# Altium PCB Print PCB.PcbDoc
Units mil, origin at the board's own origin, x right, y up, seen from the top; angles counter-clockwise.
Board outline 6000 x 4000 mil, 2 copper layers (Top Layer, Bottom Layer); 170 components, 0 nets, 488 pads, 112 vias.
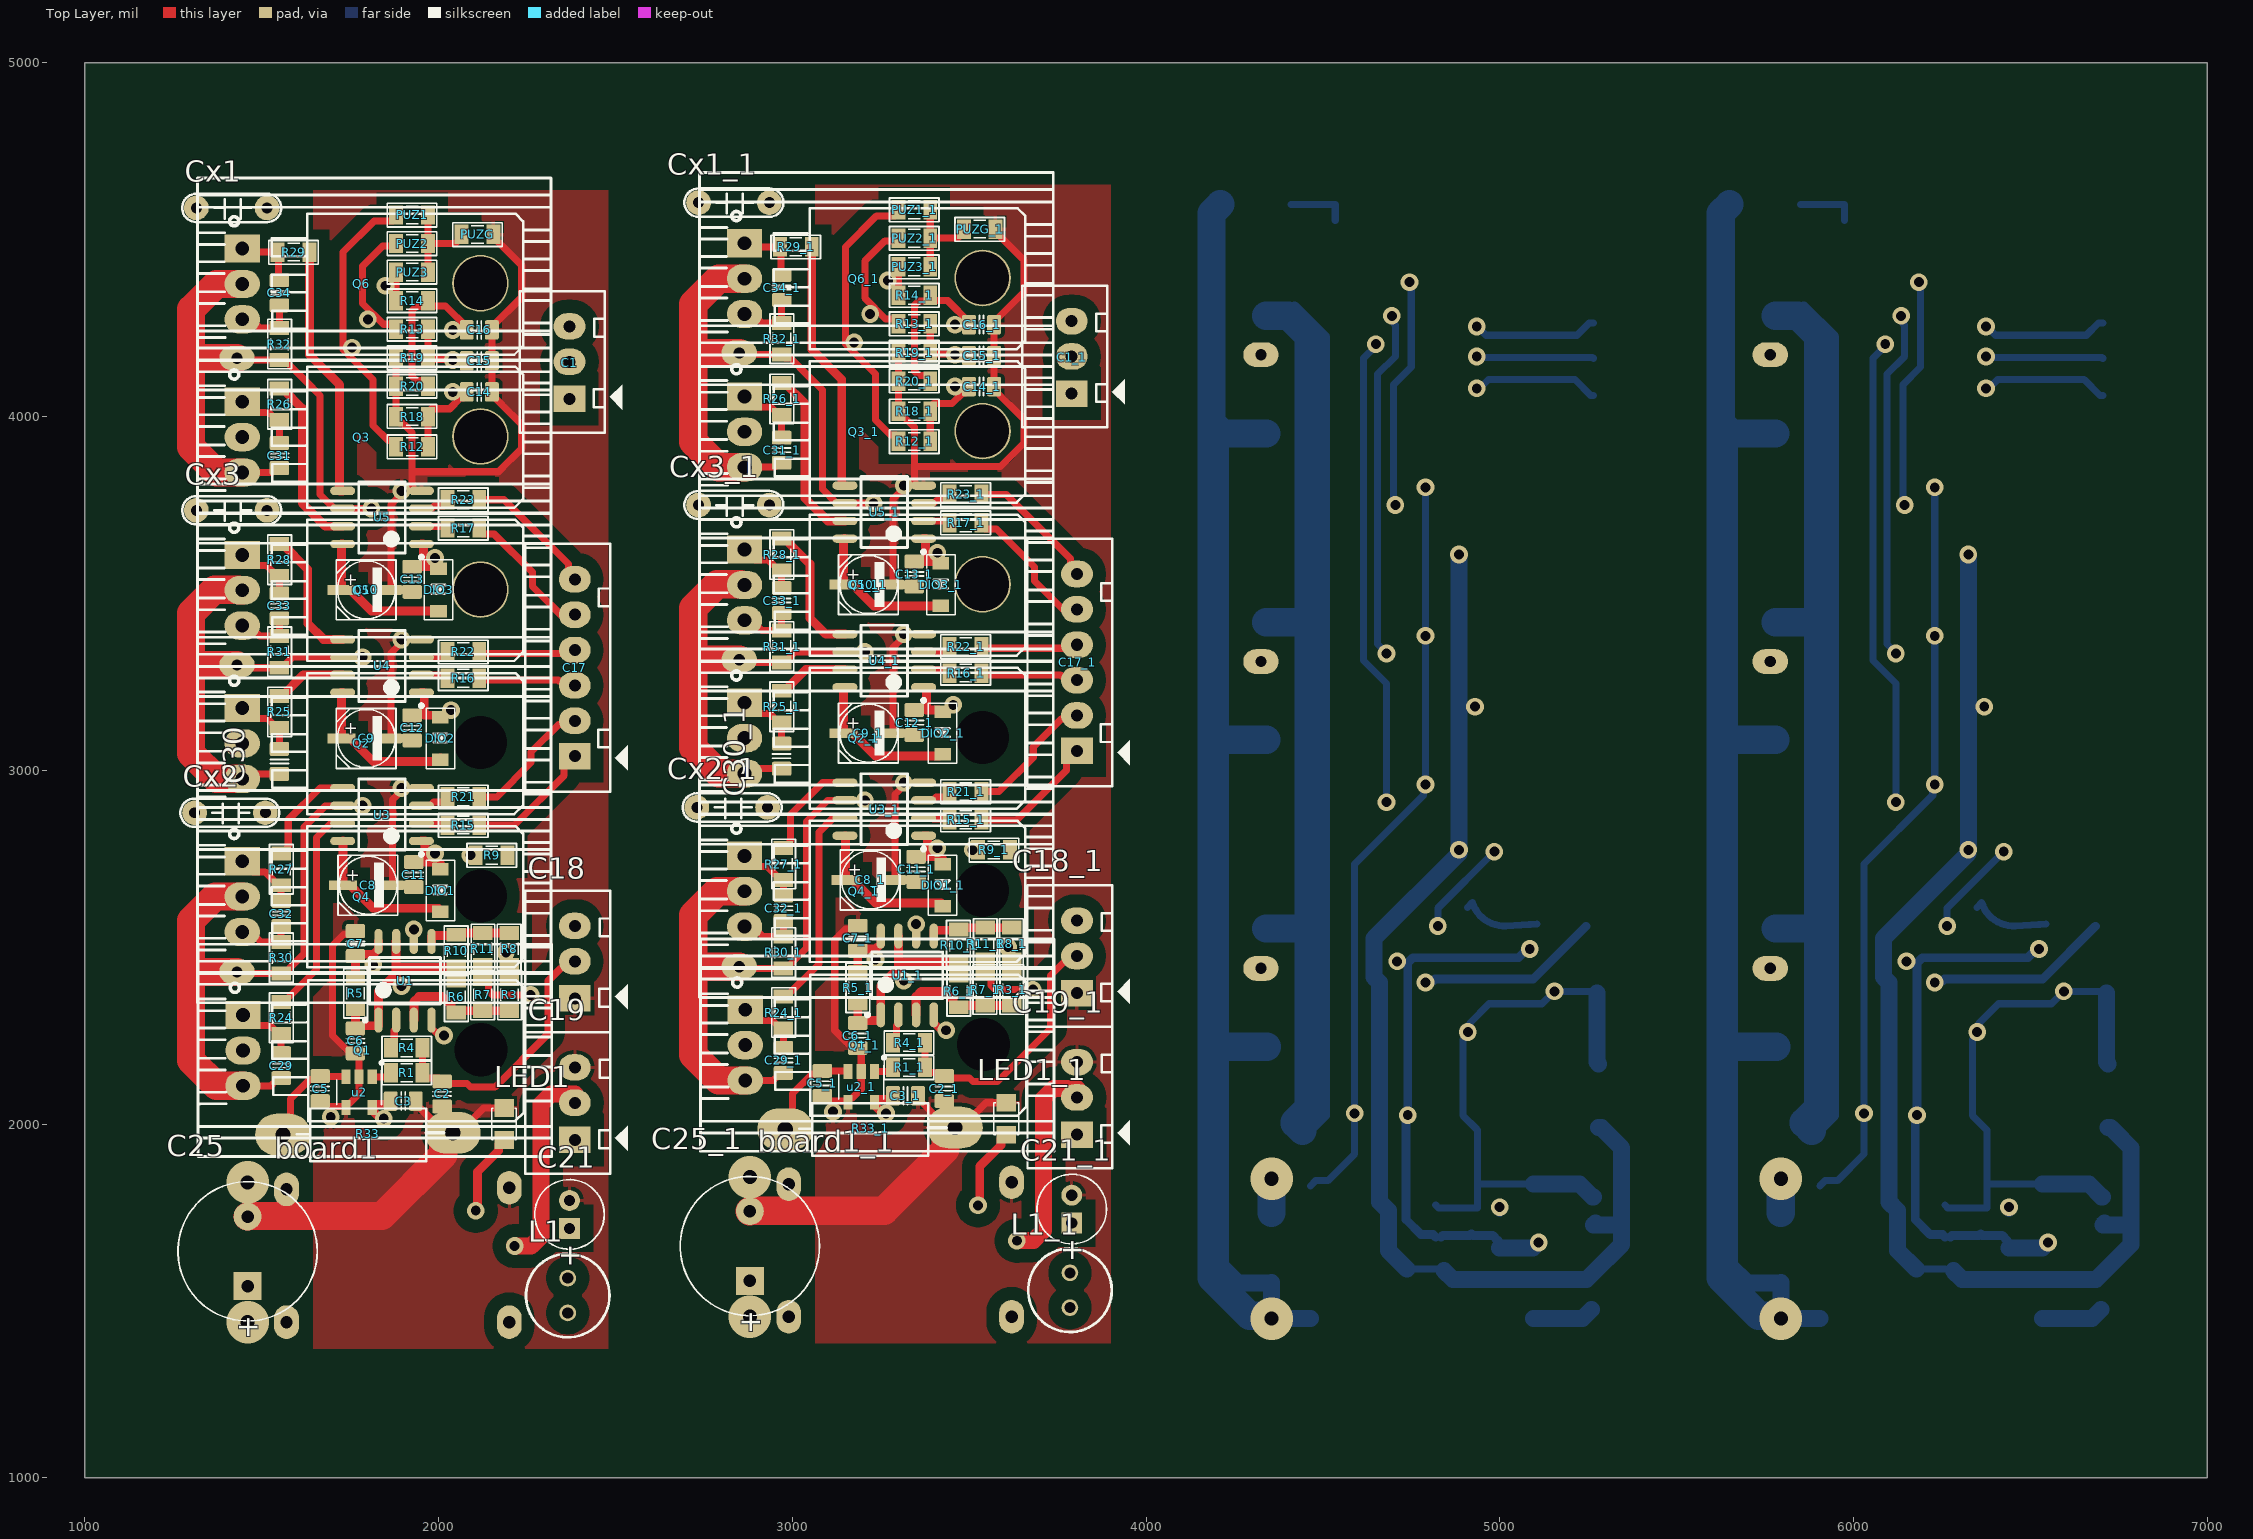
[diagram p0: Top Layer view]
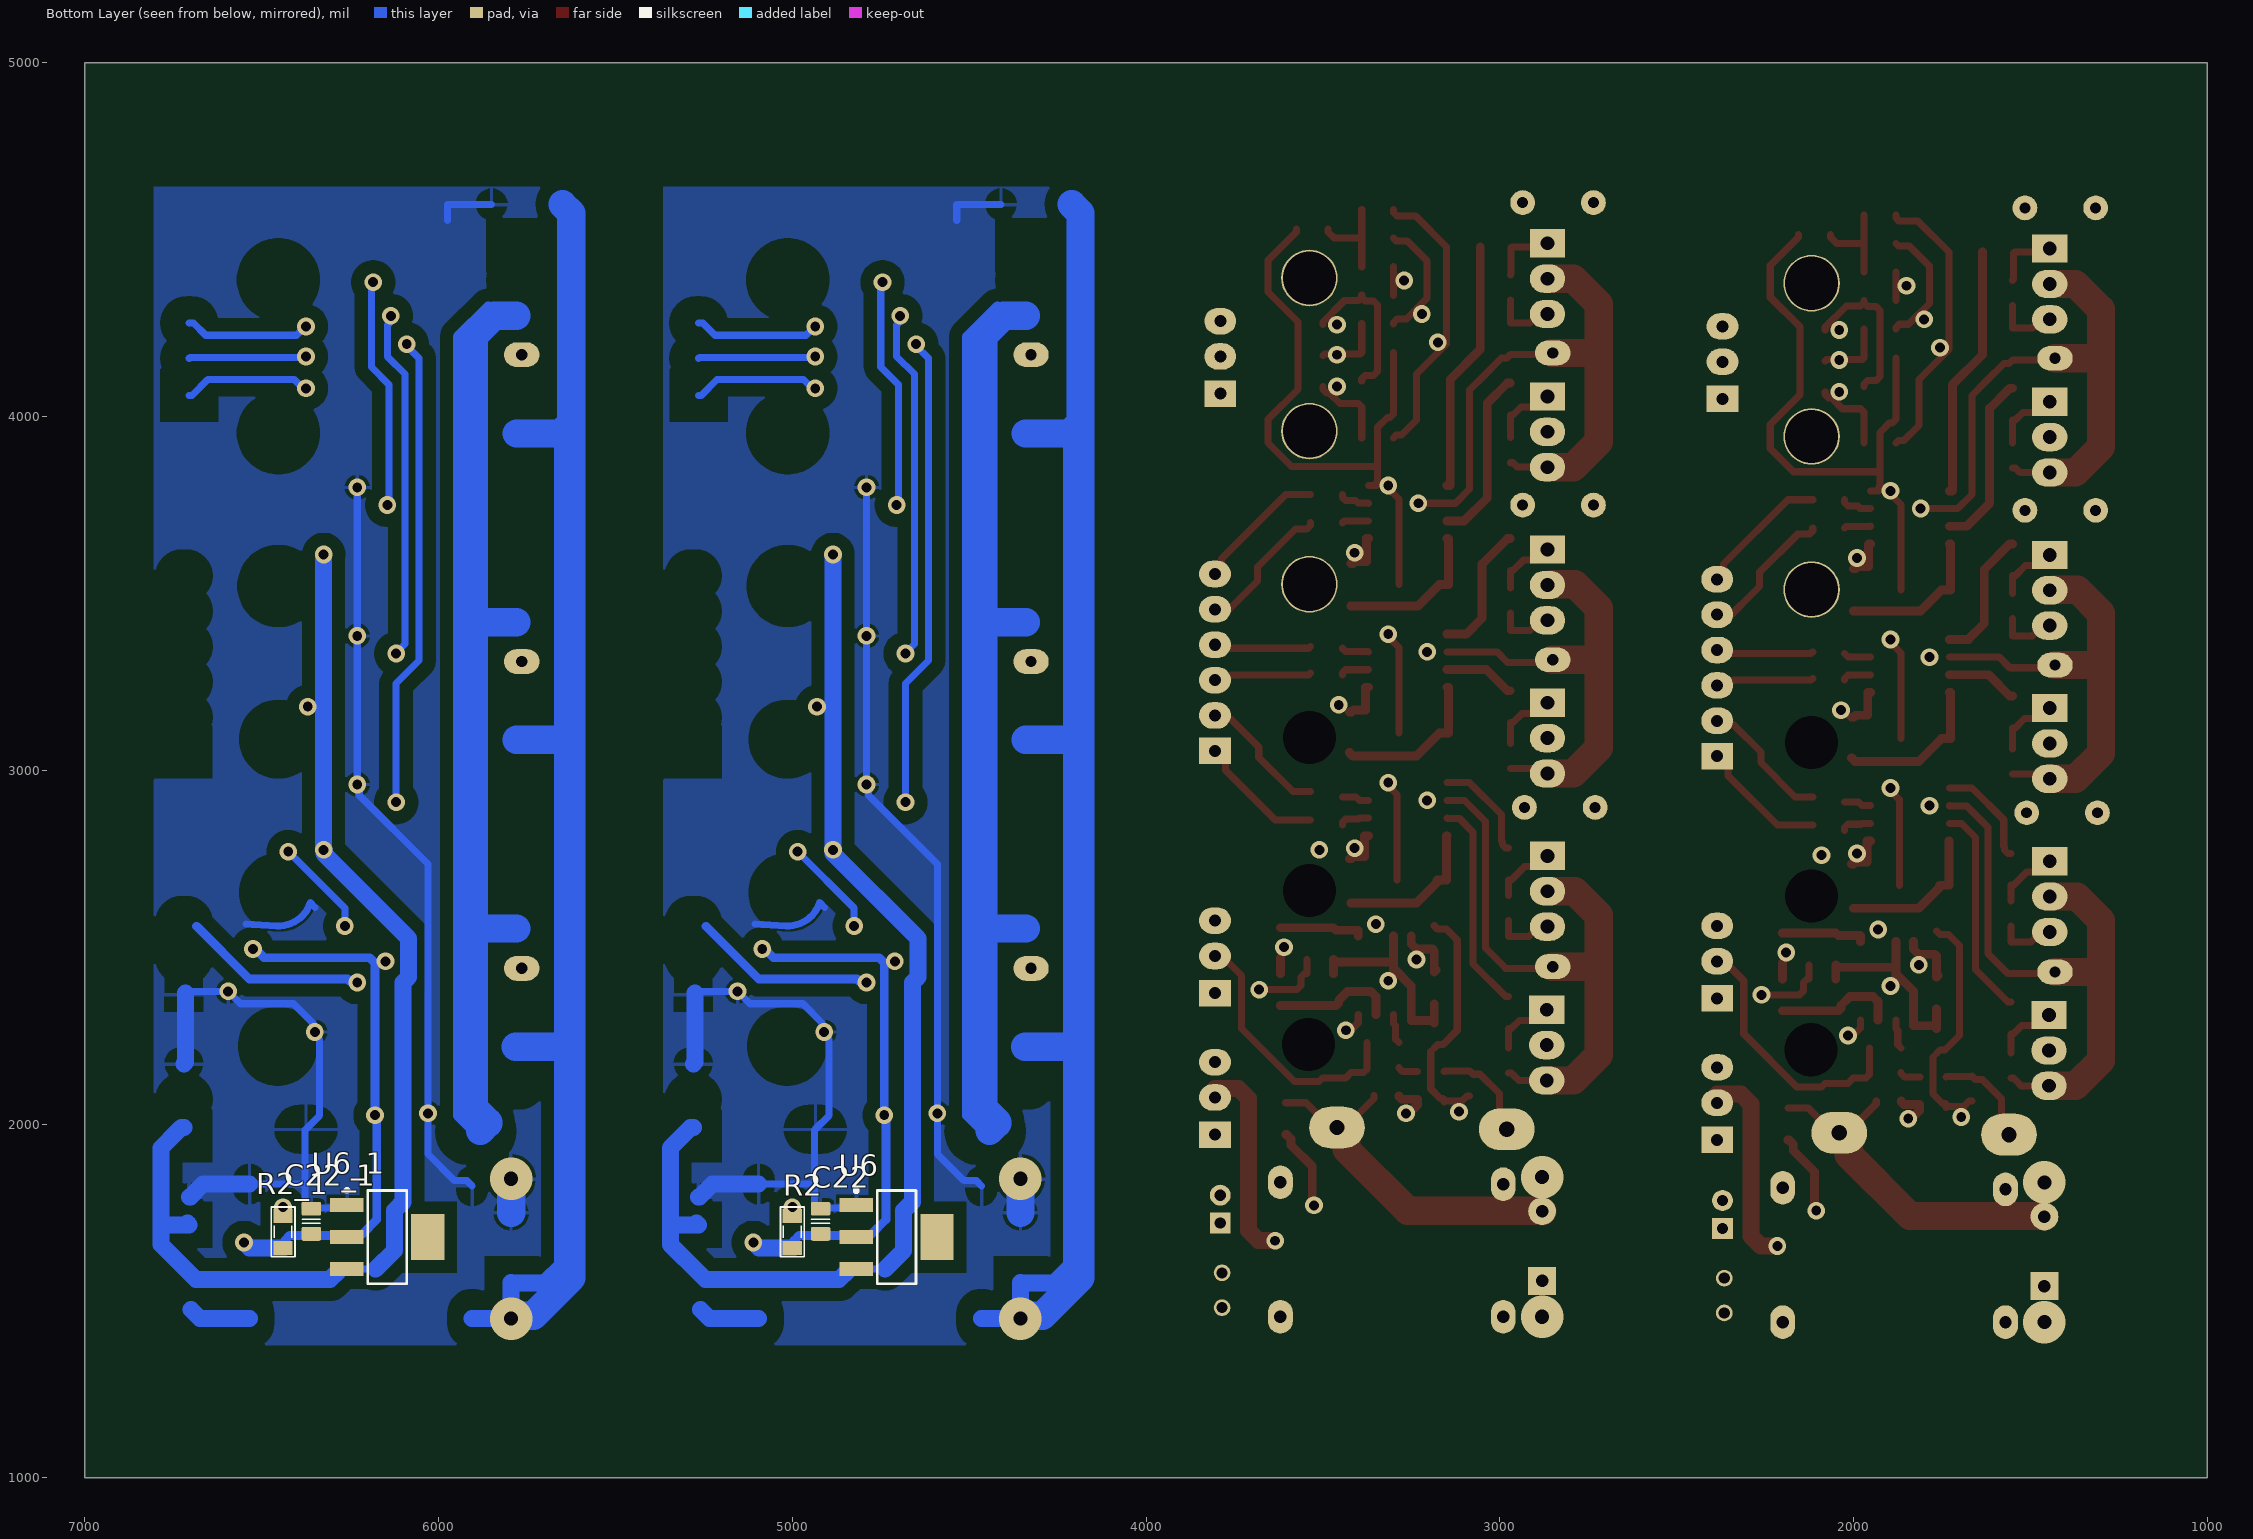
[diagram p1: Bottom Layer view, seen from below]

## Layer stack, top to bottom
Top Solder: solder mask 0.4, Solder Resist, Dk 3.5
Top Layer: signal copper 1.4
Dielectric 1: dielectric 12.6, FR-4, Dk 4.8
Bottom Layer: signal copper 1.4
Bottom Solder: solder mask 0.4, Solder Resist, Dk 3.5

## Board outline
1000,1000 7000,1000 7000,5000 1000,5000

## Design rules (kind name [scope] priority, off if disabled: settings)
Clearance [All] p1: gap=10 ignorepadtopadclearanceinfootprint=FALSE except(0: Arc-Hole Track-Hole SMDPad-Hole THPad-Hole Via-Hole Fill-Hole Poly-Hole Region-Hole Text-Hole)
PolygonConnect [All] p1: connectstyle=Relief reliefconductorwidth=10 reliefentries=4 polygonreliefangle="90 Angle" airgapwidth=10
RoutingVias [All] p1: holewidth=28 width=50 viastyle="Through Hole" minholewidth=28 minwidth=50 maxholewidth=28 maxwidth=50
SolderMaskExpansion [All] p1: expansion=4 istentingtop=FALSE
Width [All] p1: maxlimit=10 minlimit=10 preferedwidth=10
30 further rules are at their usual default settings.

## Components (designator, comment, footprint, x,y, rotation, side; value= is the part's Value field where it differs from the comment)
board1 "Converter DC-DC" mini360 1527,1395 r0 top
board1_1 "Converter DC-DC" mini360 2947,1410 r0 top (schematic designator board1)
C1 "Header3" Header3 2370,4055 r90 top
C1_1 "Header3" Header3 3790,4070 r90 top (schematic designator C1)
C2 "approved sub OK" CAPC2012X135N 2010,2085 r270 top value=0805
C2_1 "approved sub OK" CAPC2012X135N 3430,2100 r270 top value=0805 (schematic designator C2)
C3 "approved sub OK" CAPC2012X135N 1900,2065 r180 top value=0805
C3_1 "approved sub OK" CAPC2012X135N 3320,2080 r180 top value=0805 (schematic designator C3)
C5 "approved sub OK" CAPC2012X135N 1665,2100 r90 top value=0805
C5_1 "approved sub OK" CAPC2012X135N 3085,2115 r90 top value=0805 (schematic designator C5)
C6 "approved sub OK" CAPC2012X135N 1765,2235 r90 top value=0805
C6_1 "approved sub OK" CAPC2012X135N 3185,2250 r90 top value=0805 (schematic designator C6)
C7 "approved sub OK" CAPC2012X135N 1765,2510 r270 top value=0805
C7_1 "approved sub OK" CAPC2012X135N 3185,2525 r270 top value=0805 (schematic designator C7)
C8 "CN-ALU-SMD" CAP-ALU-SMD-5.5x5.5 1800,2675 r0 top
C8_1 "CN-ALU-SMD" CAP-ALU-SMD-5.5x5.5 3220,2690 r0 top (schematic designator C8)
C9 "CN-ALU-SMD" CAP-ALU-SMD-5.5x5.5 1795,3090 r0 top
C9_1 "CN-ALU-SMD" CAP-ALU-SMD-5.5x5.5 3215,3105 r0 top (schematic designator C9)
C10 "CN-ALU-SMD" CAP-ALU-SMD-5.5x5.5 1795,3510 r0 top
C10_1 "CN-ALU-SMD" CAP-ALU-SMD-5.5x5.5 3215,3525 r0 top (schematic designator C10)
C11 "approved sub OK" CAPC2012X135N 1930,2705 r90 top value=0805
C11_1 "approved sub OK" CAPC2012X135N 3350,2720 r90 top value=0805 (schematic designator C11)
C12 "approved sub OK" CAPC2012X135N 1925,3120 r90 top value=0805
C12_1 "approved sub OK" CAPC2012X135N 3345,3135 r90 top value=0805 (schematic designator C12)
C13 "approved sub OK" CAPC2012X135N 1925,3540 r90 top value=0805
C13_1 "approved sub OK" CAPC2012X135N 3345,3555 r90 top value=0805 (schematic designator C13)
C14 "approved sub OK" CAPC2012X135N 2115,4070 r0 top value=0805
C14_1 "approved sub OK" CAPC2012X135N 3535,4085 r0 top value=0805 (schematic designator C14)
C15 "approved sub OK" CAPC2012X135N 2115,4157.5 r0 top value=0805
C15_1 "approved sub OK" CAPC2012X135N 3535,4172.5 r0 top value=0805 (schematic designator C15)
C16 "approved sub OK" CAPC2012X135N 2115,4245 r0 top value=0805
C16_1 "approved sub OK" CAPC2012X135N 3535,4260 r0 top value=0805 (schematic designator C16)
C17 "Header6" Header6 2385,3040 r90 top
C17_1 "Header6" Header6 3805,3055 r90 top (schematic designator C17)
C18 "Header3" Header3 2385,2360 r90 top
C18_1 "Header3" Header3 3805,2375 r90 top (schematic designator C18)
C19 "Header3" Header3 2385,1960 r90 top
C19_1 "Header3" Header3 3805,1975 r90 top (schematic designator C19)
C21 "d5" CA-ALU-5 2370,1744.37 r90 top value=104
C21_1 "d5" CA-ALU-5 3790,1759.37 r90 top value=104 (schematic designator C21)
C22 "approved sub OK" CAPC2012X135N 4920,1725 r270 bottom value=0805
C22_1 "approved sub OK" CAPC2012X135N 6360,1725 r270 bottom value=0805 (schematic designator C22)
C25 "CN-10" CA-ALU-10 1460,1640 r90 top value=104
C25_1 "CN-10" CA-ALU-10 2880,1655 r90 top value=104 (schematic designator C25)
C29 "approved sub OK" CAPC2012X135N 1555,2165 r270 top value=0805
C29_1 "approved sub OK" CAPC2012X135N 2975,2180 r270 top value=0805 (schematic designator C29)
C30 "approved sub OK" CAPC2012X135N 1550,3025 r270 top value=0805
C30_1 "approved sub OK" CAPC2012X135N 2970,3040 r270 top value=0805 (schematic designator C30)
C31 "approved sub OK" CAPC2012X135N 1550,3890 r270 top value=0805
C31_1 "approved sub OK" CAPC2012X135N 2970,3905 r270 top value=0805 (schematic designator C31)
C32 "approved sub OK" CAPC2012X135N 1555,2595 r270 top value=0805
C32_1 "approved sub OK" CAPC2012X135N 2975,2610 r270 top value=0805 (schematic designator C32)
C33 "approved sub OK" CAPC2012X135N 1550,3465 r270 top value=0805
C33_1 "approved sub OK" CAPC2012X135N 2970,3480 r270 top value=0805 (schematic designator C33)
C34 "approved sub OK" CAPC2012X135N 1550,4350 r270 top value=0805
C34_1 "approved sub OK" CAPC2012X135N 2970,4365 r270 top value=0805 (schematic designator C34)
Cx1 "U" CN2-LT 1415,4585 r180 top value=33pF
Cx1_1 "U" CN2-LT 2835,4600 r180 top value=33pF (schematic designator Cx1)
Cx2 "V" CN2-LT 1410,2875 r180 top value=33pF
Cx2_1 "V" CN2-LT 2830,2890 r180 top value=33pF (schematic designator Cx2)
Cx3 "W" CN2-LT 1415,3730 r180 top value=33pF
Cx3_1 "W" CN2-LT 2835,3745 r180 top value=33pF (schematic designator Cx3)
DIO1 "Diode SMD" DIO-SMD-123 2005,2660 r90 top value=1N5007
DIO1_1 "Diode SMD" DIO-SMD-123 3425,2675 r90 top value=1N5007 (schematic designator DIO1)
DIO2 "Diode SMD" DIO-SMD-123 2005,3090 r90 top value=1N5007
DIO2_1 "Diode SMD" DIO-SMD-123 3425,3105 r90 top value=1N5007 (schematic designator DIO2)
DIO3 "Diode SMD" DIO-SMD-123 2000,3510 r90 top value=1N5007
DIO3_1 "Diode SMD" DIO-SMD-123 3420,3525 r90 top value=1N5007 (schematic designator DIO3)
L1 "L-DIP-1" L-DIP-M-5.3 2365,1515 r90 top value="150 mH"
L1_1 "L-DIP-1" L-DIP-M-5.3 3785,1530 r90 top value="150 mH" (schematic designator L1)
LED1 "bl" LED-0805-Blue 2185,1955 r90 top value="LED 3 - 5 ly 2 Colour"
LED1_1 "bl" LED-0805-Blue 3605,1970 r90 top value="LED 3 - 5 ly 2 Colour" (schematic designator LED1)
PUZ1 "0805" RES-SMD-0805 1925,4570 r0 top
PUZ1_1 "0805" RES-SMD-0805 3345,4585 r0 top (schematic designator PUZ1)
PUZ2 "0805" RES-SMD-0805 1925,4489.38 r0 top
PUZ2_1 "0805" RES-SMD-0805 3345,4504.38 r0 top (schematic designator PUZ2)
PUZ3 "0805" RES-SMD-0805 1925,4408.75 r0 top
PUZ3_1 "0805" RES-SMD-0805 3345,4423.75 r0 top (schematic designator PUZ3)
PUZG "0805" RES-SMD-0805 2110,4515 r0 top
PUZG_1 "0805" RES-SMD-0805 3530,4530 r0 top (schematic designator PUZG)
Q1 "dow" TO220NH#1 1447,2308 r270 top locked value=IRF840
Q1_1 "dow" TO220NH#1 2867,2323 r270 top locked value=IRF840 (schematic designator Q1)
Q2 "dow" TO220NH#2 1445,3176 r270 top locked value=IRF840
Q2_1 "dow" TO220NH#2 2865,3191 r270 top locked value=IRF840 (schematic designator Q2)
Q3 "dow" TO220NH#3 1445,4042 r270 top locked value=IRF840
Q3_1 "dow" TO220NH#3 2865,4057 r270 top locked value=IRF840 (schematic designator Q3)
Q4 "dow" TO220NH#2 1445,2743 r270 top locked value=IRF840
Q4_1 "dow" TO220NH#2 2865,2758 r270 top locked value=IRF840 (schematic designator Q4)
Q5 "dow" TO220NH#3 1445,3609 r270 top locked value=IRF840
Q5_1 "dow" TO220NH#3 2865,3624 r270 top locked value=IRF840 (schematic designator Q5)
Q6 "dow" TO220NH#3 1445,4475 r270 top locked value=IRF840
Q6_1 "dow" TO220NH#3 2865,4490 r270 top locked value=IRF840 (schematic designator Q6)
R1 "10" RES-SMD-0805 1910,2145 r0 top
R1_1 "10" RES-SMD-0805 3330,2160 r0 top (schematic designator R1)
R2 "0805" RES-SMD-0805 5000,1695 r90 bottom
R2_1 "0805" RES-SMD-0805 6440,1695 r90 bottom (schematic designator R2)
R3 "0805" RES-SMD-0805 2200,2365 r90 top
R3_1 "0805" RES-SMD-0805 3620,2380 r90 top (schematic designator R3)
R4 "0805" RES-SMD-0805 1910,2215 r0 top
R4_1 "0805" RES-SMD-0805 3330,2230 r0 top (schematic designator R4)
R5 "0805" RES-SMD-0805 1765,2370 r90 top
R5_1 "0805" RES-SMD-0805 3185,2385 r90 top (schematic designator R5)
R6 "0805" RES-SMD-0805 2050,2360 r90 top
R6_1 "0805" RES-SMD-0805 3470,2375 r90 top (schematic designator R6)
R7 "0805" RES-SMD-0805 2125,2365 r270 top
R7_1 "0805" RES-SMD-0805 3545,2380 r270 top (schematic designator R7)
R8 "0805" RES-SMD-0805 2200,2495 r270 top
R8_1 "0805" RES-SMD-0805 3620,2510 r270 top (schematic designator R8)
R9 "0805" RES-SMD-0805 2150,2760 r0 top
R9_1 "0805" RES-SMD-0805 3570,2775 r0 top (schematic designator R9)
R10 "0805" RES-SMD-0805 2050,2490 r270 top
R10_1 "0805" RES-SMD-0805 3470,2505 r270 top (schematic designator R10)
R11 "0805" RES-SMD-0805 2125,2495 r90 top
R11_1 "0805" RES-SMD-0805 3545,2510 r90 top (schematic designator R11)
R12 "0805" RES-SMD-0805 1925,3915 r0 top
R12_1 "0805" RES-SMD-0805 3345,3930 r0 top (schematic designator R12)
R13 "0805" RES-SMD-0805 1925,4247.5 r0 top
R13_1 "0805" RES-SMD-0805 3345,4262.5 r0 top (schematic designator R13)
R14 "0805" RES-SMD-0805 1925,4328.12 r0 top
R14_1 "0805" RES-SMD-0805 3345,4343.12 r0 top (schematic designator R14)
R15 "0805" RES-SMD-0805 2070,2845 r0 top
R15_1 "0805" RES-SMD-0805 3490,2860 r0 top (schematic designator R15)
R16 "0805" RES-SMD-0805 2070,3260 r0 top
R16_1 "0805" RES-SMD-0805 3490,3275 r0 top (schematic designator R16)
R17 "0805" RES-SMD-0805 2070,3685 r0 top
R17_1 "0805" RES-SMD-0805 3490,3700 r0 top (schematic designator R17)
R18 "0805" RES-SMD-0805 1925,4000 r180 top
R18_1 "0805" RES-SMD-0805 3345,4015 r180 top (schematic designator R18)
R19 "0805" RES-SMD-0805 1925,4165.88 r180 top
R19_1 "0805" RES-SMD-0805 3345,4180.88 r180 top (schematic designator R19)
R20 "0805" RES-SMD-0805 1925,4085.25 r180 top
R20_1 "0805" RES-SMD-0805 3345,4100.25 r180 top (schematic designator R20)
R21 "0805" RES-SMD-0805 2070,2925 r0 top
R21_1 "0805" RES-SMD-0805 3490,2940 r0 top (schematic designator R21)
R22 "0805" RES-SMD-0805 2070,3335 r0 top
R22_1 "0805" RES-SMD-0805 3490,3350 r0 top (schematic designator R22)
R23 "0805" RES-SMD-0805 2070,3765 r0 top
R23_1 "0805" RES-SMD-0805 3490,3780 r0 top (schematic designator R23)
R24 "0805" RES-SMD-0805 1555,2300 r90 top
R24_1 "0805" RES-SMD-0805 2975,2315 r90 top (schematic designator R24)
R25 "0805" RES-SMD-0805 1550,3165 r90 top
R25_1 "0805" RES-SMD-0805 2970,3180 r90 top (schematic designator R25)
R26 "0805" RES-SMD-0805 1550,4035 r90 top
R26_1 "0805" RES-SMD-0805 2970,4050 r90 top (schematic designator R26)
R27 "0805" RES-SMD-0805 1555,2720 r90 top
R27_1 "0805" RES-SMD-0805 2975,2735 r90 top (schematic designator R27)
R28 "0805" RES-SMD-0805 1550,3595 r90 top
R28_1 "0805" RES-SMD-0805 2970,3610 r90 top (schematic designator R28)
R29 "0805" RES-SMD-0805 1590,4465 r0 top
R29_1 "0805" RES-SMD-0805 3010,4480 r0 top (schematic designator R29)
R30 "0805" RES-SMD-0805 1555,2470 r90 top
R30_1 "0805" RES-SMD-0805 2975,2485 r90 top (schematic designator R30)
R31 "0805" RES-SMD-0805 1550,3335 r90 top
R31_1 "0805" RES-SMD-0805 2970,3350 r90 top (schematic designator R31)
R32 "0805" RES-SMD-0805 1550,4205 r90 top
R32_1 "0805" RES-SMD-0805 2970,4220 r90 top (schematic designator R32)
R33 "1/2" RES-1/2W 1820,1970 r180 top
R33_1 "1/2" RES-1/2W 3240,1985 r180 top (schematic designator R33)
U1 "LM393" SO8 1905,2405 r90 top
U1_1 "LM393" SO8 3325,2420 r90 top (schematic designator U1)
u2 "INA180" SOT-23-5 1775,2090 r270 top
u2_1 "INA180" SOT-23-5 3195,2105 r270 top (schematic designator u2)
U3 "IR2101" SO8 1840,2875 r180 top
U3_1 "IR2101" SO8 3260,2890 r180 top (schematic designator U3)
U4 "IR2101" SO8 1840,3295 r180 top
U4_1 "IR2101" SO8 3260,3310 r180 top (schematic designator U4)
U5 "IR2101" SO8 1840,3715 r180 top
U5_1 "IR2101" SO8 3260,3730 r180 top (schematic designator U5)
U6 "LM1117-3.3V" SOT223 4705,1680 r270 bottom
U6_1 "LM1117-3.3V" SOT223 6145,1680 r270 bottom (schematic designator U6)

## Footprints (in the part's own frame and the unit in brackets; to place one, negate y for a bottom-side part, rotate by r counter-clockwise, add the part's x,y. Pads: shape width x height; smd on the part's side, far side on the other; paste and mask are expansions set on the pad)
CA-ALU-5 [mm] "Polarized capacitors, Aluminum Electrolytic Capacitors, 2-Leads, Body 5x11x2x0.5"
  rect 1.5x1.5 hole 0.8: 1(-1,0)
  round 1.5 hole 0.8: 2(1,0)
  silkscreen extent -2.5,-2.5 2.5,2.5, body extent -2.41,-2.5 2.59,2.5, height 11
CA-ALU-10 [mm] "Polarized capacitors, Aluminum Electrolytic Capacitors, 2-Leads, Body 10x20x5x0.6"
  rect 2x2 hole 0.9: 1(-2.5,0)
  round 2 hole 0.9: 2(2.5,0)
  silkscreen extent -5,-5 5,5, body extent -5.08,-20.32 5.08,2.9, height 14.86
CAP-ALU-SMD-5.5x5.5 [mm]
  rect 2x0.7 smd: 1(-1.778,0)
  oval 2x0.7 smd: 2(1.778,0)
  silkscreen extent -2.15,-2.15 2.15,2.15, body extent -2.3,-2.15 2.3,2.15, height 5.4
CAPC2012X135N [mm] "Chip Capacitor, Body 2.0x1.2mm, EIA 0805, IPC Medium Density"
  round 0.254 on Mech15: 0(0,0)
  rrect25% 1x1.4 smd: 1(-0.9,0) 2(0.9,0)
  Top Layer pour cut-out: -0.675,0.7 -0.475,0.9 0.475,0.9 0.675,0.7 0.675,-0.7 0.475,-0.9 -0.475,-0.9 -0.675,-0.7
  silkscreen extent -0.15,-0.65 0.15,0.65, body extent -1.1,-0.72 1.1,0.73, height 1.34
CN2-LT [mil]
  round 70 hole 31: 1(-100,-5) 2(100,-5)
  silkscreen extent -140,-45 140,35, body extent -110,-48 110,39, height 276
DIO-SMD-123 [mm]
  rect 0.9x1.2 smd: 1(1.524,0) 2(-1.524,0)
  silkscreen extent -2.16,-1.02 2.16,1.02, body extent -1.76,-0.8 1.94,0.8, height 1.25
Header3 [mil] "CON 3"
  rect 75x90 hole 34: 1(-5,0)
  oval 75x90 hole 34: 2(100,0) 3(200,0)
  silkscreen extent -100,-150 300,140, body extent -95,-90 295,136, height 276
Header6 [mil] "CON6"
  rect 75x90 hole 34: 1(0,0)
  oval 75x90 hole 34: 2(100,0) 3(200,0) 4(300,0) 5(400,0) 6(500,0)
  silkscreen extent -100,-150 600,140
L-DIP-M-5.3 [mm] "THT Inductor, 2-Leads, Body 5.3  mm"
  round 1.2 hole 0.8: 1(-1.25,0) 2(1.25,0)
  silkscreen extent -3,-3 3,3, body extent -2.46,-2.44 2.44,2.45, height 7.49
LED-0805-Blue [mil]
  rect 50x55 smd: 1(0,0) 2(90,0)
  silkscreen extent 0,-35 90,35, body extent 5,-25 85,25, height 43
mini360 [mil] "power 3A"
  oval 70x95 hole 35: 1(43,420) 2(43,45) 3(673,425) 4(673,45)
  body extent 0,0 712,472, height 178
RES-1/2W [mm]
  oval 4x3 hole 1.1: 1(-5.588,-0.127) 2(6.604,0)
  silkscreen extent -4.95,-1.87 5.61,1.91, body extent -5.84,-1.52 6.86,1.43, height 4.08
RES-SMD-0805 [mil]
  rect 39.37x55 smd: 1(-45,0) 2(45,0)
  silkscreen extent -70,-34 70,33, body extent -39,-25 39,25, height 31
SO8 [mm] "SOIC, 8-Leads, Body 4.9x3.9mm, Pitch 1.27mm, IPC High Density"
  oval 1.8x0.6 smd: 1(-2.825,1.905) 2(-2.825,0.635) 3(-2.825,-0.635) 4(-2.825,-1.905) 5(2.825,-1.905) 6(2.825,-0.635) 7(2.825,0.635) 8(2.825,1.905)
  silkscreen extent -2.95,-2.55 1.68,2.98, body extent -2.99,-2.45 3,2.45, height 1.6
SOT223 [mm]
  rect 1x2.4 smd: 1(-2.3,-2.9) 2(0,-2.9) 3(2.3,-2.9)
  rect 3.3x2.4 smd: 4(0,2.9)
  silkscreen extent -3.47,-3.03 3.35,1.4, body extent -3.25,-3.56 3.25,3.4, height 1.68
SOT-23-5 [mm]
  rect 1.06x0.65 smd: 1(-1.1,0.95) 2(-1.1,0) 3(-1.1,-0.95) 4(1.1,-0.95) 5(1.1,0.95)
  silkscreen extent -2.19,-1.61 0.9,1.72, body extent -1.25,-1.5 1.25,1.5, height 1.1
TO220NH#1 [mil] "TO-220 - 1-2-3"
  rect 80x100 hole 39: 1(0,0)
  oval 80x100 hole 39: 2(100,0) 3(200,0)
  round 0 hole 150: vcc(98,673)
  silkscreen extent -200,-127 400,873, body extent -100,-4 300,764
TO220NH#2 [mil] "TO-220 - 1-2-3"
  rect 80x100 hole 39: 1(0,0)
  oval 80x100 hole 39: 2(100,0) 3(200,0)
  round 0 hole 150: H(98,673)
  silkscreen extent -200,-127 400,873, body extent -100,-4 300,764
TO220NH#3 [mil] "TO-220 - 1-2-3"
  rect 80x100 hole 39: 1(0,0)
  oval 80x100 hole 39: 2(100,0) 3(200,0)
  round 160 hole 150: H(98,673)
  silkscreen extent -200,-127 400,873, body extent -100,-4 300,764

## Part data
board1 board1_1: "Step DC-DC"
C1 C1_1 C18 C18_1 C19 C19_1: "Header IDC, 3 x 1 Pin Vertical 2.54mm Pitch (Non-Boxed, Male)", Manufacturer="W¨¹rth Elektronik eiSos GmbH", partNo=613002143121, ComponentLink1 Description=Manufacturer, ComponentLink1URL=http://www.we-online.com, ComponentLink2 Description=Datasheet, ComponentLink2URL=http://katalog.we-online.de/em/datasheet/6130xx143121.pdf, Created by="Karrer Zheng", Created Date="29 March 2013", NoPins=02
C2 C2_1 C3 C3_1 C5 C5_1 C6 C6_1 C7 C7_1 C11 C11_1 C12 C12_1 C13 C13_1 C14 C14_1 C15 C15_1 C16 C16_1 C22 C22_1 C29 C29_1 C30 C30_1 C31 C31_1 C32 C32_1 C33 C33_1 C34 C34_1: library part "CAP C_0805", "Capacitor SMD Cer 1.8nF 10% 50V X7R 0805", Manufacturer 1="AVX Corporation", Manufacturer Part Number 1=08055C182KAT2A, Operating Temperature="-55°C ~ 125°C", Package / Case="0805 (2012 metric)", Ratings="50V; X7R", Supplier Part Number 1=478-1374-1-ND, Tolerance=±10%, SCDType=source*, Supplier 1=Digi-Key
C8 C8_1 C9 C9_1 C10 C10_1: "Polarized Capacitor (Axial)", LatestRevisionDate=17-Jul-2002, LatestRevisionNote="Re-released for DXP Platform.", PackageReference=POLAR0.8, Published=8-Jun-2000, Publisher="Altium Limited"
C17 C17_1: "Header IDC, 6 x 1 Pin Vertical 2.54mm Pitch (Non-Boxed, Male)", Manufacturer="W¨¹rth Elektronik eiSos GmbH", partNo=613002143121, ComponentLink1 Description=Manufacturer, ComponentLink1URL=http://www.we-online.com, ComponentLink2 Description=Datasheet, ComponentLink2URL=http://katalog.we-online.de/em/datasheet/6130xx143121.pdf, Created by="Karrer Zheng", Created Date="29 March 2013", NoPins=02
C21 C21_1 C25 C25_1: library part CN-ALU-DIP, "Capacitor (Semiconductor SIM Model)", LatestRevisionDate=17-Jul-2002, LatestRevisionNote="Re-released for DXP Platform.", PackageReference=C1206, Publisher="Altium Limited"
Cx1 Cx1_1 Cx2 Cx2_1 Cx3 Cx3_1: library part CN
DIO1 DIO1_1 DIO2 DIO2_1 DIO3 DIO3_1: "Default Diode", Code - JEDEC=DO-214-AB, Published=8-Jun-2000, Publisher="Altium Limited", Revision="July-2002: Re-released for DXP Platform."
L1 L1_1: "Inductor"
LED1 LED1_1: library part "LED SMD"
PUZ1 PUZ1_1 PUZ2 PUZ2_1 PUZ3 PUZ3_1 PUZG PUZG_1 R1 R1_1 R2 R2_1 R3 R3_1 R4 R4_1 R5 R5_1 R6 R6_1 R7 R7_1 R8 R8_1 R9 R9_1 R10 R10_1 R11 R11_1 R12 R12_1 R13 R13_1 R14 R14_1 R15 R15_1 R16 R16_1 R17 R17_1 R18 R18_1 R19 R19_1 R20 R20_1 R21 R21_1 R22 R22_1 R23 R23_1 R24 R24_1 R25 R25_1 R26 R26_1 R27 R27_1 R28 R28_1 R29 R29_1 R30 R30_1 R31 R31_1 R32 R32_1: library part Res-SMD, "Resistor", Manufacturer="Generic Components", Class=Passive, Published=08/06/2000, Publisher="Altium Hobart Technology Centre"
Q1 Q1_1 Q2 Q2_1 Q3 Q3_1 Q4 Q4_1 Q5 Q5_1 Q6 Q6_1: library part IRF840, "MOSFET N - CHANNEL 500V - 0.75 - 8A - TO-220"
R33 R33_1: library part Res, "Res", Manufacturer="Generic Components", Class=Passive, Published=08/06/2000, Publisher="Altium Hobart Technology Centre", SubClass=R
U1 U1_1: "IC DUAL COMPARATOR"
u2 u2_1: library part SOT-23-5_SMD, "SMD_IC_SOT-23-5"
U3 U3_1 U4 U4_1 U5 U5_1: library part IR2101S, "Half-Bridge Driver"
U6 U6_1: library part LM1117, "800mA Low-Dropout Linear Regulator", Creator="Nguyen Ba Bien", Website=http://group3i.net

## Free pads (board coordinates)
  oval 100x70 hole 32: 4(1430,2430) 4(1430,3297.5) 4(1430,4165) 4(2850,2445) 4(2850,3312.5) 4(2850,4180) 4(4325,2440) 4(4325,3307.5) 4(4325,4175) 4(5765,2440) 4(5765,3307.5) 4(5765,4175)

## Via types
v1: diameter 50, hole 28, Top Layer to Bottom Layer, 104 vias
v2: diameter 120, hole 40, Top Layer to Bottom Layer, 8 vias

## Nets (pads, with @x,y where several pads share a name; then routed paths per layer and width w, separated by ;. In a path a pad name is that pad's centre, name@x,y a point inside that pad or via, vN(x,y) a via of type N, cw(c..) or ccw(c..) an arc to the next point about the centre after c; other vN are vias at no path point)
pads on no net: board1.1 board1.2 board1.3 board1.4 board1_1.1 board1_1.2 board1_1.3 board1_1.4 C1.1 C1.2 C1.3 C1_1.1 C1_1.2 C1_1.3 C2.0 C2.1 C2.2 C2_1.0 C2_1.1 C2_1.2 C3.0 C3.1 C3.2 C3_1.0 C3_1.1 C3_1.2 C5.0 C5.1 C5.2 C5_1.0 C5_1.1 C5_1.2 C6.0 C6.1 C6.2 C6_1.0 C6_1.1 C6_1.2 C7.0 C7.1 C7.2 C7_1.0 C7_1.1 C7_1.2 C8.1 C8.2 C8_1.1 C8_1.2 C9.1 C9.2 C9_1.1 C9_1.2 C10.1 C10.2 C10_1.1 C10_1.2 C11.0 C11.1 C11.2 C11_1.0 C11_1.1 C11_1.2 C12.0 C12.1 C12.2 C12_1.0 C12_1.1 C12_1.2 C13.0 C13.1 C13.2 C13_1.0 C13_1.1 C13_1.2 C14.0 C14.1 C14.2 C14_1.0 C14_1.1 C14_1.2 C15.0 C15.1 C15.2 C15_1.0 C15_1.1 C15_1.2 C16.0 C16.1 C16.2 C16_1.0 C16_1.1 C16_1.2 C17.1 C17.2 C17.3 C17.4 C17.5 C17.6 C17_1.1 C17_1.2 C17_1.3 C17_1.4 C17_1.5 C17_1.6 C18.1 C18.2 C18.3 C18_1.1 C18_1.2 C18_1.3 C19.1 C19.2 C19.3 C19_1.1 C19_1.2 C19_1.3 C21.1 C21.2 C21_1.1 C21_1.2 C22.0 C22.1 C22.2 C22_1.0 C22_1.1 C22_1.2 C25.1 C25.2 C25_1.1 C25_1.2 C29.0 C29.1 C29.2 C29_1.0 C29_1.1 C29_1.2 C30.0 C30.1 C30.2 C30_1.0 C30_1.1 C30_1.2 C31.0 C31.1 C31.2 C31_1.0 C31_1.1 C31_1.2 C32.0 C32.1 C32.2 C32_1.0 C32_1.1 C32_1.2 C33.0 C33.1 C33.2 C33_1.0 C33_1.1 C33_1.2 C34.0 C34.1 C34.2 C34_1.0 C34_1.1 C34_1.2 Cx1.1 Cx1.2 Cx1_1.1 Cx1_1.2 Cx2.1 Cx2.2 Cx2_1.1 Cx2_1.2 Cx3.1 Cx3.2 Cx3_1.1 Cx3_1.2 DIO1.1 DIO1.2 DIO1_1.1 DIO1_1.2 DIO2.1 DIO2.2 DIO2_1.1 DIO2_1.2 DIO3.1 DIO3.2 DIO3_1.1 DIO3_1.2 L1.1 L1.2 L1_1.1 L1_1.2 LED1.1 LED1.2 LED1_1.1 LED1_1.2 PUZ1.1 PUZ1.2 PUZ1_1.1 PUZ1_1.2 PUZ2.1 PUZ2.2 PUZ2_1.1 PUZ2_1.2 PUZ3.1 PUZ3.2 PUZ3_1.1 PUZ3_1.2 PUZG.1 PUZG.2 PUZG_1.1 PUZG_1.2 Q1.1 Q1.2 Q1.3 Q1.vcc Q1_1.1 Q1_1.2 Q1_1.3 Q1_1.vcc Q2.1 Q2.2 Q2.3 Q2.H Q2_1.1 Q2_1.2 Q2_1.3 Q2_1.H Q3.1 Q3.2 Q3.3 Q3.H Q3_1.1 Q3_1.2 Q3_1.3 Q3_1.H Q4.1 Q4.2 Q4.3 Q4.H Q4_1.1 Q4_1.2 Q4_1.3 Q4_1.H Q5.1 Q5.2 Q5.3 Q5.H Q5_1.1 Q5_1.2 Q5_1.3 Q5_1.H Q6.1 Q6.2 Q6.3 Q6.H Q6_1.1 Q6_1.2 Q6_1.3 Q6_1.H R1.1 R1.2 R1_1.1 R1_1.2 R2.1 R2.2 R2_1.1 R2_1.2 R3.1 R3.2 R3_1.1 R3_1.2 R4.1 R4.2 R4_1.1 R4_1.2 R5.1 R5.2 R5_1.1 R5_1.2 R6.1 R6.2 R6_1.1 R6_1.2 R7.1 R7.2 R7_1.1 R7_1.2 R8.1 R8.2 R8_1.1 R8_1.2 R9.1 R9.2 R9_1.1 R9_1.2 R10.1 R10.2 R10_1.1 R10_1.2 R11.1 R11.2 R11_1.1 R11_1.2 R12.1 R12.2 R12_1.1 R12_1.2 R13.1 R13.2 R13_1.1 R13_1.2 R14.1 R14.2 R14_1.1 R14_1.2 R15.1 R15.2 R15_1.1 R15_1.2 R16.1 R16.2 R16_1.1 R16_1.2 R17.1 R17.2 R17_1.1 R17_1.2 R18.1 R18.2 R18_1.1 R18_1.2 R19.1 R19.2 R19_1.1 R19_1.2 R20.1 R20.2 R20_1.1 R20_1.2 R21.1 R21.2 R21_1.1 R21_1.2 R22.1 R22.2 R22_1.1 R22_1.2 R23.1 R23.2 R23_1.1 R23_1.2 R24.1 R24.2 R24_1.1 R24_1.2 R25.1 R25.2 R25_1.1 R25_1.2 R26.1 R26.2 R26_1.1 R26_1.2 R27.1 R27.2 R27_1.1 R27_1.2 R28.1 R28.2 R28_1.1 R28_1.2 R29.1 R29.2 R29_1.1 R29_1.2 R30.1 R30.2 R30_1.1 R30_1.2 R31.1 R31.2 R31_1.1 R31_1.2 R32.1 R32.2 R32_1.1 R32_1.2 R33.1 R33.2 R33_1.1 R33_1.2 U1.1 U1.2 U1.3 U1.4 U1.5 U1.6 U1.7 U1.8 U1_1.1 U1_1.2 U1_1.3 U1_1.4 U1_1.5 U1_1.6 U1_1.7 U1_1.8 u2.1 u2.2 u2.3 u2.4 u2.5 u2_1.1 u2_1.2 u2_1.3 u2_1.4 u2_1.5 U3.1 U3.2 U3.3 U3.4 U3.5 U3.6 U3.7 U3.8 U3_1.1 U3_1.2 U3_1.3 U3_1.4 U3_1.5 U3_1.6 U3_1.7 U3_1.8 U4.1 U4.2 U4.3 U4.4 U4.5 U4.6 U4.7 U4.8 U4_1.1 U4_1.2 U4_1.3 U4_1.4 U4_1.5 U4_1.6 U4_1.7 U4_1.8 U5.1 U5.2 U5.3 U5.4 U5.5 U5.6 U5.7 U5.8 U5_1.1 U5_1.2 U5_1.3 U5_1.4 U5_1.5 U5_1.6 U5_1.7 U5_1.8 U6.1 U6.2 U6.3 U6.4 U6_1.1 U6_1.2 U6_1.3 U6_1.4
copper on no net: | length 97972.8
  Top Layer w20: 1440,3290 1550,3290 1557.81,3290 1587.82,3320 1728.78,3320 ; 1440,4160 1550,4160 1559.69,4150.31 1574.69,4150.31 1625,4100 1665,4060 1665,3780.16 1705.16,3740 1728.78,3740 v1(1810,3740) ; 1445,2425 1555,2425 1562.81,2425 1572.5,2434.68 1620,2482.18 1620,2840 1679.31,2899.31 1728.09,2899.31 1728.78,2900 ; 1445,2543 1469.5,2543 1497.5,2515 1555,2515 1555,2559.57 ; 1445,2743 1475,2713 1509.18,2713 1547.19,2675 1555,2675 1555,2630.43 ; 1445,2976 1471.24,2976 1484.8,2989.57 1550,2989.57 ; 1445,3176 1475,3146 1516.19,3146 1542.19,3120 1550,3120 1550,3060.43 ; 1445,3409 1465.43,3409 1494.43,3380 1550,3380 1550,3429.57 ; 1445,3609 1475,3579 1513.18,3579 1542.19,3550 1550,3550 1550,3500.43 ; 1445,3842 1529.56,3842 1542.13,3854.57 1550,3854.57 ; 1445,4042 1475,4012 1520.18,4012 1542.19,3990 1550,3990 1550,3925.43 ; 1445,4275 1469.43,4275 1494.43,4250 1550,4250 1550,4314.57 ; 1445,4475 1455,4465 1545,4465 1547.5,4462.5 1547.5,4387.93 1550,4385.43 ; 1447,2108 1525.73,2108 1537.44,2119.72 1537.44,2119.88 1547.13,2129.57 1555,2129.57 ; 1447,2308 1477,2278 1524.18,2278 1547.19,2255 1555,2255 1555,2200.43 ; 1555,2345 1562.81,2345 1655,2437.18 1655,2810 1694.31,2849.31 1728.09,2849.31 1728.78,2850 ; 1555,2765 1562.81,2765 1572.5,2774.68 1572.5,2782.5 1575,2785 1575,2860 1665,2950 1728.78,2950 ; 1560,1970 1580.75,1990.75 1580.75,2070.75 1635.75,2125.75 1655.31,2125.75 1665,2135.43 1666.06,2134.37 1736.54,2134.37 1737.6,2133.31 ; 1665,2064.57 1672.87,2064.57 1687.44,2050 1734.81,2050 1737.6,2047.2 1737.6,2054.77 1740.4,2057.56 1747.96,2057.56 1775,2084.6 1775,2133.31 1775,2189.88 ; 1765,2199.57 1755.31,2209.25 1740.75,2209.25 1700,2250 1700,2505 1730.75,2535.75 1755.31,2535.75 1765,2545.43 ; 1812.4,2133.31 1855.31,2133.31 1865,2142.99 1865,2145 ; 1865,2215 1874.68,2224.69 1874.68,2263.86 1880,2269.18 1880,2293.78 ; 1865,3090 1865,3331.88 1895,3361.88 v1(1895,3370) ; 1865,3510 1865,3751.88 1895,3781.88 v1(1895,3790) ; 1870,2675 1870,2916.88 1895,2941.88 v1(1895,2950) ; 1880,3925 1872.5,3932.5 1857.5,3932.5 1815,3975 1815,4105 1730,4190 1730,4465 1817.5,4552.5 1870.31,4552.5 1880,4562.19 1880,4570 ; 1880,4000 1880,3992.19 1889.69,3982.5 1897.5,3982.5 1925,3955 1925,3845 ; 1880,4004.62 1880,4085.25 1880,4165.88 ; 1880,4247.5 1880,4251.37 1870.31,4261.06 1843.94,4261.06 1785,4320 1785,4425 1842.03,4482.03 1872.65,4482.03 1880,4489.38 ; 1880,4328.12 1880,4408.75 ; 1935.43,2065 1935.43,2057.13 2017.56,1975 2020.31,1975 ; 1951.22,2850 1975.82,2850 1978.32,2847.5 2015.31,2847.5 2025,2837.81 2025,2830 ; 1951.22,2900 1975.82,2900 1985.82,2910 2025,2910 ; 1951.22,3270 1951.91,3269.31 2015.31,3269.31 2025,3259.62 2025,3255 ; 1951.22,3320 1951.91,3320.69 2015.69,3320.69 2025,3330 ; 1951.22,3690 1951.91,3689.31 2020.69,3689.31 2025,3685 ; 1951.22,3740 1951.91,3740.69 1980.69,3740.69 1987.5,3747.5 2015.31,3747.5 2025,3757.19 2025,3765 ; 1951.22,3790 1928.58,3790 1926.91,3791.67 1926.91,3801.62 1925,3803.53 1925,3845 ; 1955,2215 1955,2145 1955,2139.8 1964.68,2130.12 2000.31,2130.12 2015.43,2115 2080.65,2115 2090.65,2105 2160,2105 2310,2255 2310,2405 2345.22,2440.22 ; 1970,3925 1970,4004.62 1970,4012.44 1979.69,4022.12 2031.69,4022.12 2062.01,4052.44 2069.88,4052.44 2079.57,4062.13 2079.57,4070 ; 1970,4085.25 1970,4091.89 1960.32,4101.58 1936.72,4101.58 1925,4113.29 1925,4300.08 1936.72,4311.8 1960.31,4311.8 1970,4321.48 1970,4322.44 ; 1970,4247.5 1970,4165.88 1974.19,4161.69 2075.38,4161.69 2079.57,4157.5 ; 1970,4328.12 1970,4322.44 ; 1970,4408.75 1970,4489.38 ; 1970,4570 1970,4489.38 ; 1980,2293.78 1980,2271.14 1995.4,2255.74 2009.26,2255.74 v1(2015,2250) ; 2040,1975 2057.5,1975 2127.5,2045 2185,2045 ; 2065,4515 2065,4507.19 2047.19,4489.38 1970,4489.38 ; 2079.57,4245 2079.57,4252.87 2019.68,4312.76 1979.68,4312.76 1970,4322.44 ; 2115,2845 2215,2845 2355.04,2985.04 2355.04,3012.5 2382.54,3040 2385,3040 ; 2115,2925 2164.68,2925 2261.29,3021.6 2261.29,3051.29 2339.48,3129.48 2374.48,3129.48 2385,3140 ; 2115,3260 2120,3255 2338.28,3255 2342.76,3250.52 2374.48,3250.52 2385,3240 ; 2115,3335 2120,3330 2375,3330 2385,3340 ; 2115,3685 2115,3677.19 2124.68,3667.5 2157.5,3667.5 2265,3560 2265,3520 2365,3420 ; 2115,3765 2185,3765 2366.98,3583.02 2366.98,3558.02 2385,3540 ; 2125,2450 2125,2410 2131.64,2410 2141.33,2400.31 2141.33,2376.72 2153.04,2365 v1(2260,2365) ; 2155,4515 2155,4507.19 2235,4427.18 2235,4337.44 2150.43,4252.87 2150.43,4245 2150.43,4157.5 2150.43,4070 2150.43,4062.13 2235,3977.56 2235,3910 2169,3844 1926,3844 1925,3845 ; 2375,3440 2385,3440 ; 2860,3305 2970,3305 2977.81,3305 3007.82,3335 3148.78,3335 ; 2860,4175 2970,4175 2979.69,4165.31 2994.69,4165.31 3045,4115 3085,4075 3085,3795.16 3125.16,3755 3148.78,3755 v1(3230,3755) ; 2865,2440 2975,2440 2982.81,2440 2992.5,2449.68 3040,2497.18 3040,2855 3099.31,2914.31 3148.09,2914.31 3148.78,2915 ; 2865,2558 2889.5,2558 2917.5,2530 2975,2530 2975,2574.57 ; 2865,2758 2895,2728 2929.18,2728 2967.19,2690 2975,2690 2975,2645.43 ; 2865,2991 2891.24,2991 2904.8,3004.57 2970,3004.57 ; 2865,3191 2895,3161 2936.19,3161 2962.19,3135 2970,3135 2970,3075.43 ; 2865,3424 2885.43,3424 2914.43,3395 2970,3395 2970,3444.57 ; 2865,3624 2895,3594 2933.18,3594 2962.19,3565 2970,3565 2970,3515.43 ; 2865,3857 2949.56,3857 2962.13,3869.57 2970,3869.57 ; 2865,4057 2895,4027 2940.18,4027 2962.19,4005 2970,4005 2970,3940.43 ; 2865,4290 2889.43,4290 2914.43,4265 2970,4265 2970,4329.57 ; 2865,4490 2875,4480 2965,4480 2967.5,4477.5 2967.5,4402.93 2970,4400.43 ; 2867,2123 2945.73,2123 2957.44,2134.72 2957.44,2134.88 2967.13,2144.57 2975,2144.57 ; 2867,2323 2897,2293 2944.18,2293 2967.19,2270 2975,2270 2975,2215.43 ; 2975,2360 2982.81,2360 3075,2452.18 3075,2825 3114.31,2864.31 3148.09,2864.31 3148.78,2865 ; 2975,2780 2982.81,2780 2992.5,2789.68 2992.5,2797.5 2995,2800 2995,2875 3085,2965 3148.78,2965 ; 2980,1985 3000.75,2005.75 3000.75,2085.75 3055.75,2140.75 3075.31,2140.75 3085,2150.43 3086.06,2149.37 3156.54,2149.37 3157.6,2148.31 ; 3085,2079.57 3092.87,2079.57 3107.44,2065 3154.81,2065 3157.6,2062.2 3157.6,2069.77 3160.4,2072.56 3167.96,2072.56 3195,2099.6 3195,2148.31 3195,2204.88 ; 3185,2214.57 3175.31,2224.25 3160.75,2224.25 3120,2265 3120,2520 3150.75,2550.75 3175.31,2550.75 3185,2560.43 ; 3232.4,2148.31 3275.31,2148.31 3285,2157.99 3285,2160 ; 3285,2230 3294.68,2239.69 3294.68,2278.86 3300,2284.18 3300,2308.78 ; 3285,3105 3285,3346.88 3315,3376.88 v1(3315,3385) ; 3285,3525 3285,3766.88 3315,3796.88 v1(3315,3805) ; 3290,2690 3290,2931.88 3315,2956.88 v1(3315,2965) ; 3300,3940 3292.5,3947.5 3277.5,3947.5 3235,3990 3235,4120 3150,4205 3150,4480 3237.5,4567.5 3290.31,4567.5 3300,4577.19 3300,4585 ; 3300,4015 3300,4007.19 3309.69,3997.5 3317.5,3997.5 3345,3970 3345,3860 ; 3300,4019.62 3300,4100.25 3300,4180.88 ; 3300,4262.5 3300,4266.37 3290.31,4276.06 3263.94,4276.06 3205,4335 3205,4440 3262.03,4497.03 3292.65,4497.03 3300,4504.38 ; 3300,4343.12 3300,4423.75 ; 3355.43,2080 3355.43,2072.13 3437.56,1990 3440.31,1990 ; 3371.22,2865 3395.82,2865 3398.32,2862.5 3435.31,2862.5 3445,2852.81 3445,2845 ; 3371.22,2915 3395.82,2915 3405.82,2925 3445,2925 ; 3371.22,3285 3371.91,3284.31 3435.31,3284.31 3445,3274.62 3445,3270 ; 3371.22,3335 3371.91,3335.69 3435.69,3335.69 3445,3345 ; 3371.22,3705 3371.91,3704.31 3440.69,3704.31 3445,3700 ; 3371.22,3755 3371.91,3755.69 3400.69,3755.69 3407.5,3762.5 3435.31,3762.5 3445,3772.19 3445,3780 ; 3371.22,3805 3348.58,3805 3346.91,3806.67 3346.91,3816.62 3345,3818.53 3345,3860 ; 3375,2230 3375,2160 3375,2154.8 3384.68,2145.12 3420.31,2145.12 3435.43,2130 3500.65,2130 3510.65,2120 3580,2120 3730,2270 3730,2420 3765.22,2455.22 ; 3390,3940 3390,4019.62 3390,4027.44 3399.69,4037.12 3451.69,4037.12 3482.01,4067.44 3489.88,4067.44 3499.57,4077.13 3499.57,4085 ; 3390,4100.25 3390,4106.89 3380.32,4116.58 3356.72,4116.58 3345,4128.29 3345,4315.08 3356.72,4326.8 3380.31,4326.8 3390,4336.48 3390,4337.44 ; 3390,4262.5 3390,4180.88 3394.19,4176.69 3495.38,4176.69 3499.57,4172.5 ; 3390,4343.12 3390,4337.44 ; 3390,4423.75 3390,4504.38 ; 3390,4585 3390,4504.38 ; 3400,2308.78 3400,2286.14 3415.4,2270.74 3429.26,2270.74 v1(3435,2265) ; 3460,1990 3477.5,1990 3547.5,2060 3605,2060 ; 3485,4530 3485,4522.19 3467.19,4504.38 3390,4504.38 ; 3499.57,4260 3499.57,4267.87 3439.68,4327.76 3399.68,4327.76 3390,4337.44 ; 3535,2860 3635,2860 3775.04,3000.04 3775.04,3027.5 3802.54,3055 3805,3055 ; 3535,2940 3584.68,2940 3681.29,3036.6 3681.29,3066.29 3759.48,3144.48 3794.48,3144.48 3805,3155 ; 3535,3275 3540,3270 3758.28,3270 3762.76,3265.52 3794.48,3265.52 3805,3255 ; 3535,3350 3540,3345 3795,3345 3805,3355 ; 3535,3700 3535,3692.19 3544.68,3682.5 3577.5,3682.5 3685,3575 3685,3535 3785,3435 ; 3535,3780 3605,3780 3786.98,3598.02 3786.98,3573.02 3805,3555 ; 3545,2465 3545,2425 3551.64,2425 3561.33,2415.31 3561.33,2391.72 3573.04,2380 v1(3680,2380) ; 3575,4530 3575,4522.19 3655,4442.18 3655,4352.44 3570.43,4267.87 3570.43,4260 3570.43,4172.5 3570.43,4085 3570.43,4077.13 3655,3992.56 3655,3925 3589,3859 3346,3859 3345,3860 ; 3795,3455 3805,3455
  Top Layer w25: 1550,3210 1557.81,3210 1617.81,3270 1728.78,3270 ; 1550,3640 1557.81,3640 1630,3567.81 1630,3415 1675,3370 1728.78,3370 ; 1550,4080 1557.81,4080 1615,4022.81 1615,3755 1680,3690 1728.78,3690 ; 1635,4465 1635,4175 1720,4090 1720,3790.69 1720.69,3790 1728.78,3790 ; 1728.78,2800 1729.31,2800 1730,2799.31 1730,2675 1755.59,2675 1756.87,2673.72 1756.87,2668.13 1815,2610 2000,2610 ; 1728.78,3220 1725.69,3220 1725,3219.31 1725,3090 1750.59,3090 1815.59,3025 1995,3025 2005,3035 ; 1728.78,3640 1725.69,3640 1725,3639.31 1725,3510 1750.59,3510 1810.59,3450 2000,3450 ; 1765,2325 1765,2270.43 1772.19,2277.62 1829.31,2277.62 1830,2278.31 1830,2293.78 1830,2375 1880,2425 ; 1765,2415 1760,2420 1762.82,2420 1765,2422.18 1765,2474.57 1770.43,2480 1816.02,2480 1830,2493.98 1830,2516.22 ; v1(1845,2015) 1840.22,2019.78 1831.24,2019.78 1812.7,2038.33 1812.7,2046.4 1812.4,2046.7 1812.4,2054.77 1812.7,2055.06 1857.38,2055.06 1864.57,2062.25 1864.57,2065 ; 1880,2516.22 1880,2440 ; v1(1895,2390) 1895,2396.76 1880,2411.76 1880,2425 ; 1930,2293.78 1930,2345.36 1944.64,2360 2010,2360 2035,2335 2035,2327.18 2042.19,2320 2050,2320 2125,2320 2200,2320 ; 1951.22,2800 1961.14,2800 1961.83,2799.31 1961.83,2740.43 1993.66,2740.43 1999.09,2735 2005,2735 ; 1951.22,3220 1958.64,3220 1959.33,3219.31 1959.33,3155.43 1993.66,3155.43 1999.09,3150 2005,3150 ; 1951.22,3640 1956.14,3640 1956.83,3639.31 1956.83,3575.43 1988.66,3575.43 1994.09,3570 2000,3570 ; 1980,2516.22 1980,2532.13 1980.69,2532.82 2042.81,2532.82 2050,2540 2125,2540 2200,2540 ; 2050,2410 2050,2445 2050,2450 2043.29,2443.29 1883.29,2443.29 1880,2440 ; v1@2110,1755 2110,1865 2170,1925 2170,1942.5 2182.5,1955 2185,1955 ; 2200,2410 2200,2450 2200,2455 ; 2970,3225 2977.81,3225 3037.81,3285 3148.78,3285 ; 2970,3655 2977.81,3655 3050,3582.81 3050,3430 3095,3385 3148.78,3385 ; 2970,4095 2977.81,4095 3035,4037.81 3035,3770 3100,3705 3148.78,3705 ; 3055,4480 3055,4190 3140,4105 3140,3805.69 3140.69,3805 3148.78,3805 ; 3148.78,2815 3149.31,2815 3150,2814.31 3150,2690 3175.59,2690 3176.87,2688.72 3176.87,2683.13 3235,2625 3420,2625 ; 3148.78,3235 3145.69,3235 3145,3234.31 3145,3105 3170.59,3105 3235.59,3040 3415,3040 3425,3050 ; 3148.78,3655 3145.69,3655 3145,3654.31 3145,3525 3170.59,3525 3230.59,3465 3420,3465 ; 3185,2340 3185,2285.43 3192.19,2292.62 3249.31,2292.62 3250,2293.31 3250,2308.78 3250,2390 3300,2440 ; 3185,2430 3180,2435 3182.82,2435 3185,2437.18 3185,2489.57 3190.43,2495 3236.02,2495 3250,2508.98 3250,2531.22 ; v1(3265,2030) 3260.22,2034.78 3251.24,2034.78 3232.7,2053.33 3232.7,2061.4 3232.4,2061.7 3232.4,2069.77 3232.7,2070.06 3277.38,2070.06 3284.57,2077.25 3284.57,2080 ; 3300,2531.22 3300,2455 ; v1(3315,2405) 3315,2411.76 3300,2426.76 3300,2440 ; 3350,2308.78 3350,2360.36 3364.64,2375 3430,2375 3455,2350 3455,2342.18 3462.19,2335 3470,2335 3545,2335 3620,2335 ; 3371.22,2815 3381.14,2815 3381.83,2814.31 3381.83,2755.43 3413.66,2755.43 3419.09,2750 3425,2750 ; 3371.22,3235 3378.64,3235 3379.33,3234.31 3379.33,3170.43 3413.66,3170.43 3419.09,3165 3425,3165 ; 3371.22,3655 3376.14,3655 3376.83,3654.31 3376.83,3590.43 3408.66,3590.43 3414.09,3585 3420,3585 ; 3400,2531.22 3400,2547.13 3400.69,2547.82 3462.81,2547.82 3470,2555 3545,2555 3620,2555 ; 3470,2425 3470,2460 3470,2465 3463.29,2458.29 3303.29,2458.29 3300,2455 ; v1@3530,1770 3530,1880 3590,1940 3590,1957.5 3602.5,1970 3605,1970 ; 3620,2425 3620,2465 3620,2470 ; 1880,2425 1880,2440 ; 3300,2440 3300,2455
  Top Layer w48: v1(2215,1655) 2215.38,1655.38 2261.88,1655.38 2290,1683.5 2290,2056.88 2318.12,2085 2385,2085 ; v1(3635,1670) 3635.38,1670.38 3681.88,1670.38 3710,1698.5 3710,2071.88 3738.12,2100 3805,2100
  Top Layer w80: 1430,2430 1300,2430 ; 1430,3297.5 1302.5,3297.5 1300,3295 ; 1430,4165 1300,4165 ; 1445,2643 1368,2643 1300,2575 1300,2430 ; 1445,2976 1371.86,2976 1300,3047.86 1300,3295 ; 1445,3509 1435,3509 1433.14,3510.86 1366.86,3510.86 1300,3444 1300,3295 ; 1445,3842 1371.86,3842 1300,3913.86 1300,4165 ; 1445,4375 1371.86,4375 1300,4303.14 1300,4165 ; 1447,2108 1372,2108 1300,2180 1300,2430 ; 1460,1738.43 1461.57,1740 1840,1740 2013.02,1913.02 2013.02,1957.4 2030.63,1975 ; 2020.31,1975 2030.63,1975 ; 2040,1975 2030.63,1975 ; 2850,2445 2720,2445 ; 2850,3312.5 2722.5,3312.5 2720,3310 ; 2850,4180 2720,4180 ; 2865,2658 2788,2658 2720,2590 2720,2445 ; 2865,2991 2791.86,2991 2720,3062.86 2720,3310 ; 2865,3524 2855,3524 2853.14,3525.86 2786.86,3525.86 2720,3459 2720,3310 ; 2865,3857 2791.86,3857 2720,3928.86 2720,4180 ; 2865,4390 2791.86,4390 2720,4318.14 2720,4180 ; 2867,2123 2792,2123 2720,2195 2720,2445 ; 2880,1753.43 2881.57,1755 3260,1755 3433.02,1928.02 3433.02,1972.4 3450.63,1990 ; 3440.31,1990 3450.63,1990 ; 3460,1990 3450.63,1990
  Bottom Layer w20: 4410,4600 4535,4600 4535,4555 ; 4465,1825 4479.71,1839.71 4514.71,1839.71 4590,1915 v1(4590,2030) 4590,2735 4784.26,2929.26 4784.26,2954.26 v1(4790,2960) v1(4790,3380) v1(4790,3800) ; v1(4650,4205) 4650,4200 4615,4165 4615,3310 4680,3245 v1(4680,2910) ; v1(4680,3330) 4680,3331.72 4655,3356.72 4655,4120 4705,4170 4705,4258.28 4700.74,4262.54 4700.74,4279.26 v1(4695,4285) ; v1(4705,3750) 4700,3755 4700,4090 4750,4140 4750,4375 v1(4745,4380) ; 4738.1,1589.45 4819.17,1589.45 ; 4819.17,1770.55 4826.79,1762.93 4937.5,1762.93 4937.5,1830 ; v1(4825,2560) 4825,2610 v1(4985,2770) ; v1@4906.54,2256.54 4915.74,2265.74 4915.74,2285.74 4970,2340 5120,2340 v1(5155,2375) 5270,2375 5275,2370 5280,2365 ; 4909.21,2612.01 4922.53,2626 ccw(c5013,2655) 5018.31,2560.15 5083.47,2563.79 5087.4,2564.01 5105,2565 ; v1(4910,2260) 4910,2251.88 4896.54,2238.42 4896.54,2023.46 4935,1985 4937.5,1982.5 4937.5,1830 ; v1(4935,4080) 4943.12,4080 4968.12,4105 5212.5,4105 5257.5,4060 5265,4060 ; v1(4935,4170) 4937.5,4167.5 5262.5,4167.5 5265,4165 ; v1(4935,4255) 4936.72,4255 4961.72,4230 5218.28,4230 5253.28,4265 5265,4265 ; 5095,1830 4937.5,1830 ; 5850,4600 5975,4600 5975,4555 ; 5905,1825 5919.71,1839.71 5954.71,1839.71 6030,1915 v1(6030,2030) 6030,2735 6224.26,2929.26 6224.26,2954.26 v1(6230,2960) v1(6230,3380) v1(6230,3800) ; v1(6090,4205) 6090,4200 6055,4165 6055,3310 6120,3245 v1(6120,2910) ; v1(6120,3330) 6120,3331.72 6095,3356.72 6095,4120 6145,4170 6145,4258.28 6140.74,4262.54 6140.74,4279.26 v1(6135,4285) ; v1(6145,3750) 6140,3755 6140,4090 6190,4140 6190,4375 v1(6185,4380) ; 6178.1,1589.45 6259.17,1589.45 ; 6259.17,1770.55 6266.79,1762.93 6377.5,1762.93 6377.5,1830 ; v1(6265,2560) 6265,2610 v1(6425,2770) ; v1@6346.54,2256.54 6355.74,2265.74 6355.74,2285.74 6410,2340 6560,2340 v1(6595,2375) 6710,2375 6715,2370 6720,2365 ; 6349.21,2612.01 6362.53,2626 ccw(c6453,2655) 6458.31,2560.15 6523.47,2563.79 6527.4,2564.01 6545,2565 ; v1(6350,2260) 6350,2251.88 6336.54,2238.42 6336.54,2023.46 6375,1985 6377.5,1982.5 6377.5,1830 ; v1(6375,4080) 6383.12,4080 6408.12,4105 6652.5,4105 6697.5,4060 6705,4060 ; v1(6375,4170) 6377.5,4167.5 6702.5,4167.5 6705,4165 ; v1(6375,4255) 6376.72,4255 6401.72,4230 6658.28,4230 6693.28,4265 6705,4265 ; 6535,1830 6377.5,1830
  Bottom Layer w25: v1(4790,2400) 4794.78,2404.78 4811.93,2404.78 4817.14,2410 5095,2410 5244.02,2559.02 ; 4819.17,1680 4811.99,1687.19 4777.81,1687.19 4735,1730 4735,2013.24 4740,2018.24 v1(4740,2025) 4740,2455.36 4754.64,2470 5053.24,2470 5078.24,2495 v1(5085,2495) ; 4834.17,1680 4839.17,1685 4915.43,1685 4920,1689.57 4924.57,1685 4980.36,1685 4995,1670.36 4995,1667.18 5002.19,1660 ; v1@5000,1750 v1(5000,1765) v1@5000,1775 ; 5007.19,1660 5015,1660 ; v1(6230,2400) 6234.78,2404.78 6251.93,2404.78 6257.14,2410 6535,2410 6684.02,2559.02 ; 6259.17,1680 6251.99,1687.19 6217.81,1687.19 6175,1730 6175,2013.24 6180,2018.24 v1(6180,2025) 6180,2455.36 6194.64,2470 6493.24,2470 6518.24,2495 v1(6525,2495) ; 6274.17,1680 6279.17,1685 6355.43,1685 6360,1689.57 6364.57,1685 6420.36,1685 6435,1670.36 6435,1667.18 6442.19,1660 ; v1@6440,1750 v1(6440,1765) v1@6440,1775 ; 6447.19,1660 6455,1660
  Bottom Layer w30: 4420,4310 4505,4225 4505,2025 4460,1980 ; 4432.4,1980 4442.4,1980 4450,1980 ; 5860,4310 5945,4225 5945,2025 5900,1980 ; 5872.4,1980 5882.4,1980 5890,1980
  Bottom Layer w48: 4185,1625 4210,1600 ; 4210,3980 4210,3952 4210,3745 4210,3086 4210,2890 4210,2218 4210,1600 ; 4465,1450 v2(4355,1450) 4355,1551.57 4353.43,1550 4260,1550 4210,1600 ; 4738.1,1589.45 4685,1642.55 4685,1755 4660,1780 4660,2400 4645,2415 4645,2525 4884.62,2764.62 4884.62,2774.62 v1(4885,2775) ; 4842.42,1585.13 4867.55,1560 5245.79,1560 5260,1574.21 5345,1659.21 5345,1715 ; v1@4885,2774.46 v1(4885,3610) ; 5000,1650 5094.46,1650 5109.46,1665 v1(5110,1665) ; 5095,1450 5234.21,1450 5260,1475.79 ; 5095,1830 5225.75,1830 5262.01,1793.74 5265,1793.74 ; 5270.53,1720.53 5265,1715 5345,1715 ; 5275,2370 5275,2175 5280,2170 ; 5280,1990 5287.5,1990 5301,1976.5 5345,1932.5 5345,1715 ; 5625,1625 5650,1600 ; 5650,3980 5650,3952 5650,3745 5650,3086 5650,2890 5650,2218 5650,1600 ; 5905,1450 v2(5795,1450) 5795,1551.57 5793.43,1550 5700,1550 5650,1600 ; 6178.1,1589.45 6125,1642.55 6125,1755 6100,1780 6100,2400 6085,2415 6085,2525 6324.62,2764.62 6324.62,2774.62 v1(6325,2775) ; 6282.42,1585.13 6307.55,1560 6685.79,1560 6700,1574.21 6785,1659.21 6785,1715 ; v1@6325,2774.46 v1(6325,3610) ; 6440,1650 6534.46,1650 6549.46,1665 v1(6550,1665) ; 6535,1450 6674.21,1450 6700,1475.79 ; 6535,1830 6665.75,1830 6702.01,1793.74 6705,1793.74 ; 6710.53,1720.53 6705,1715 6785,1715 ; 6715,2370 6715,2175 6720,2170 ; 6720,1990 6727.5,1990 6741,1976.5 6785,1932.5 6785,1715
  Bottom Layer w80: 4210,4600 4185,4575 4185,3960 ; 4340,2553 4452,2553 4460,2545 ; 4340,3086 4210,3086 4191,3086 4185,3080 ; 4340,3419 4459,3419 4460,3420 ; 4340,3952 4210,3952 4193,3952 4185,3960 ; 4340,4285 4403.14,4285 4460,4228.14 4460,3420 ; 4342,2218 4210,2218 4197,2218 4185,2230 ; v2(4355,1450) 4347.35,1457.65 4292.35,1457.65 4185,1565 4185,1625 4185,2230 ; 4355,1748.43 v2(4355,1845) ; 4442.4,1980 4420,2002.4 4420,2005 4460,2045 4460,2545 ; 5650,4600 5625,4575 5625,3960 ; 5780,2553 5892,2553 5900,2545 ; 5780,3086 5650,3086 5631,3086 5625,3080 ; 5780,3419 5899,3419 5900,3420 ; 5780,3952 5650,3952 5633,3952 5625,3960 ; 5780,4285 5843.14,4285 5900,4228.14 5900,3420 ; 5782,2218 5650,2218 5637,2218 5625,2230 ; v2(5795,1450) 5787.35,1457.65 5732.35,1457.65 5625,1565 5625,1625 5625,2230 ; 5795,1748.43 v2(5795,1845) ; 5882.4,1980 5860,2002.4 5860,2005 5900,2045 5900,2545 ; 4185,2230 4185,3080 ; 4185,3080 4185,3960 ; 4460,2545 4460,3420 ; 5625,2230 5625,3080 ; 5625,3080 5625,3960 ; 5900,2545 5900,3420
  other v1: 2105,1755 3525,1770 1695,2020 3115,2035 1815,2450 4710,2460 6150,2460 3235,2465 2190,2485 3610,2500 1930,2550 3350,2565 2090,2760 1990,2765 3510,2775 3410,2780 1785,2900 3205,2915 2035,3170 4930,3180 6370,3180 3455,3185 1785,3320 3205,3335 1990,3600 3410,3615 2040,4070 3460,4085 2040,4160 3460,4175 1755,4195 3175,4210 2040,4245 3460,4260 1800,4275 3220,4290 1850,4370 3270,4385
  other v2: 1460,1440 2880,1455 1460,1835 2880,1850

## Polygon pours and split planes (outlines as drawn)
no net on Top Layer "NONET_L-01_P-001" (solid, remove dead copper, pour order 2): 3900,1380 3900,4655 3065,4655 3065,1380
no net on Top Layer "NONET_L-01_P-001" (solid, remove dead copper, pour order 0): 2480,1365 2480,4640 1645,4640 1645,1365
no net on Bottom Layer "NONET_L-01_P-001" (solid, remove dead copper, pour order 6): 5580,1375 5580,4650 6805,4650 6805,1375
no net on Bottom Layer "NONET_L-01_P-001" (solid, remove dead copper, pour order 5): 4140,1375 4140,4650 5365,4650 5365,1375

## Text inside footprints (layer, text, board x,y; h text height)
C8: Top Overlay "+" at 1737.01,2687.8 h35
C8_1: Top Overlay "+" at 3157.01,2702.8 h35
C9: Top Overlay "+" at 1732.01,3102.8 h35
C9_1: Top Overlay "+" at 3152.01,3117.8 h35
C10: Top Overlay "+" at 1732.01,3522.8 h35
C10_1: Top Overlay "+" at 3152.01,3537.8 h35
C21: Top Overlay "+" at 2399.02,1593.78 h59.06 r90
C21_1: Top Overlay "+" at 3819.02,1608.78 h59.06 r90
C25: Top Overlay "+" at 1489.02,1390.98 h59.06 r90
C25_1: Top Overlay "+" at 2909.02,1405.98 h59.06 r90